# Altium PCB DSP6748_F.PcbDoc (part 8 of 16)
Units mil, origin at the board's own origin, x right, y up, seen from the top; angles counter-clockwise.
Board outline 8188.98 x 4055.12 mil, 4 copper layers (Top Layer, GND, VCC, Bottom Layer); 409 components, 262 nets, 1424 pads, 350 vias.
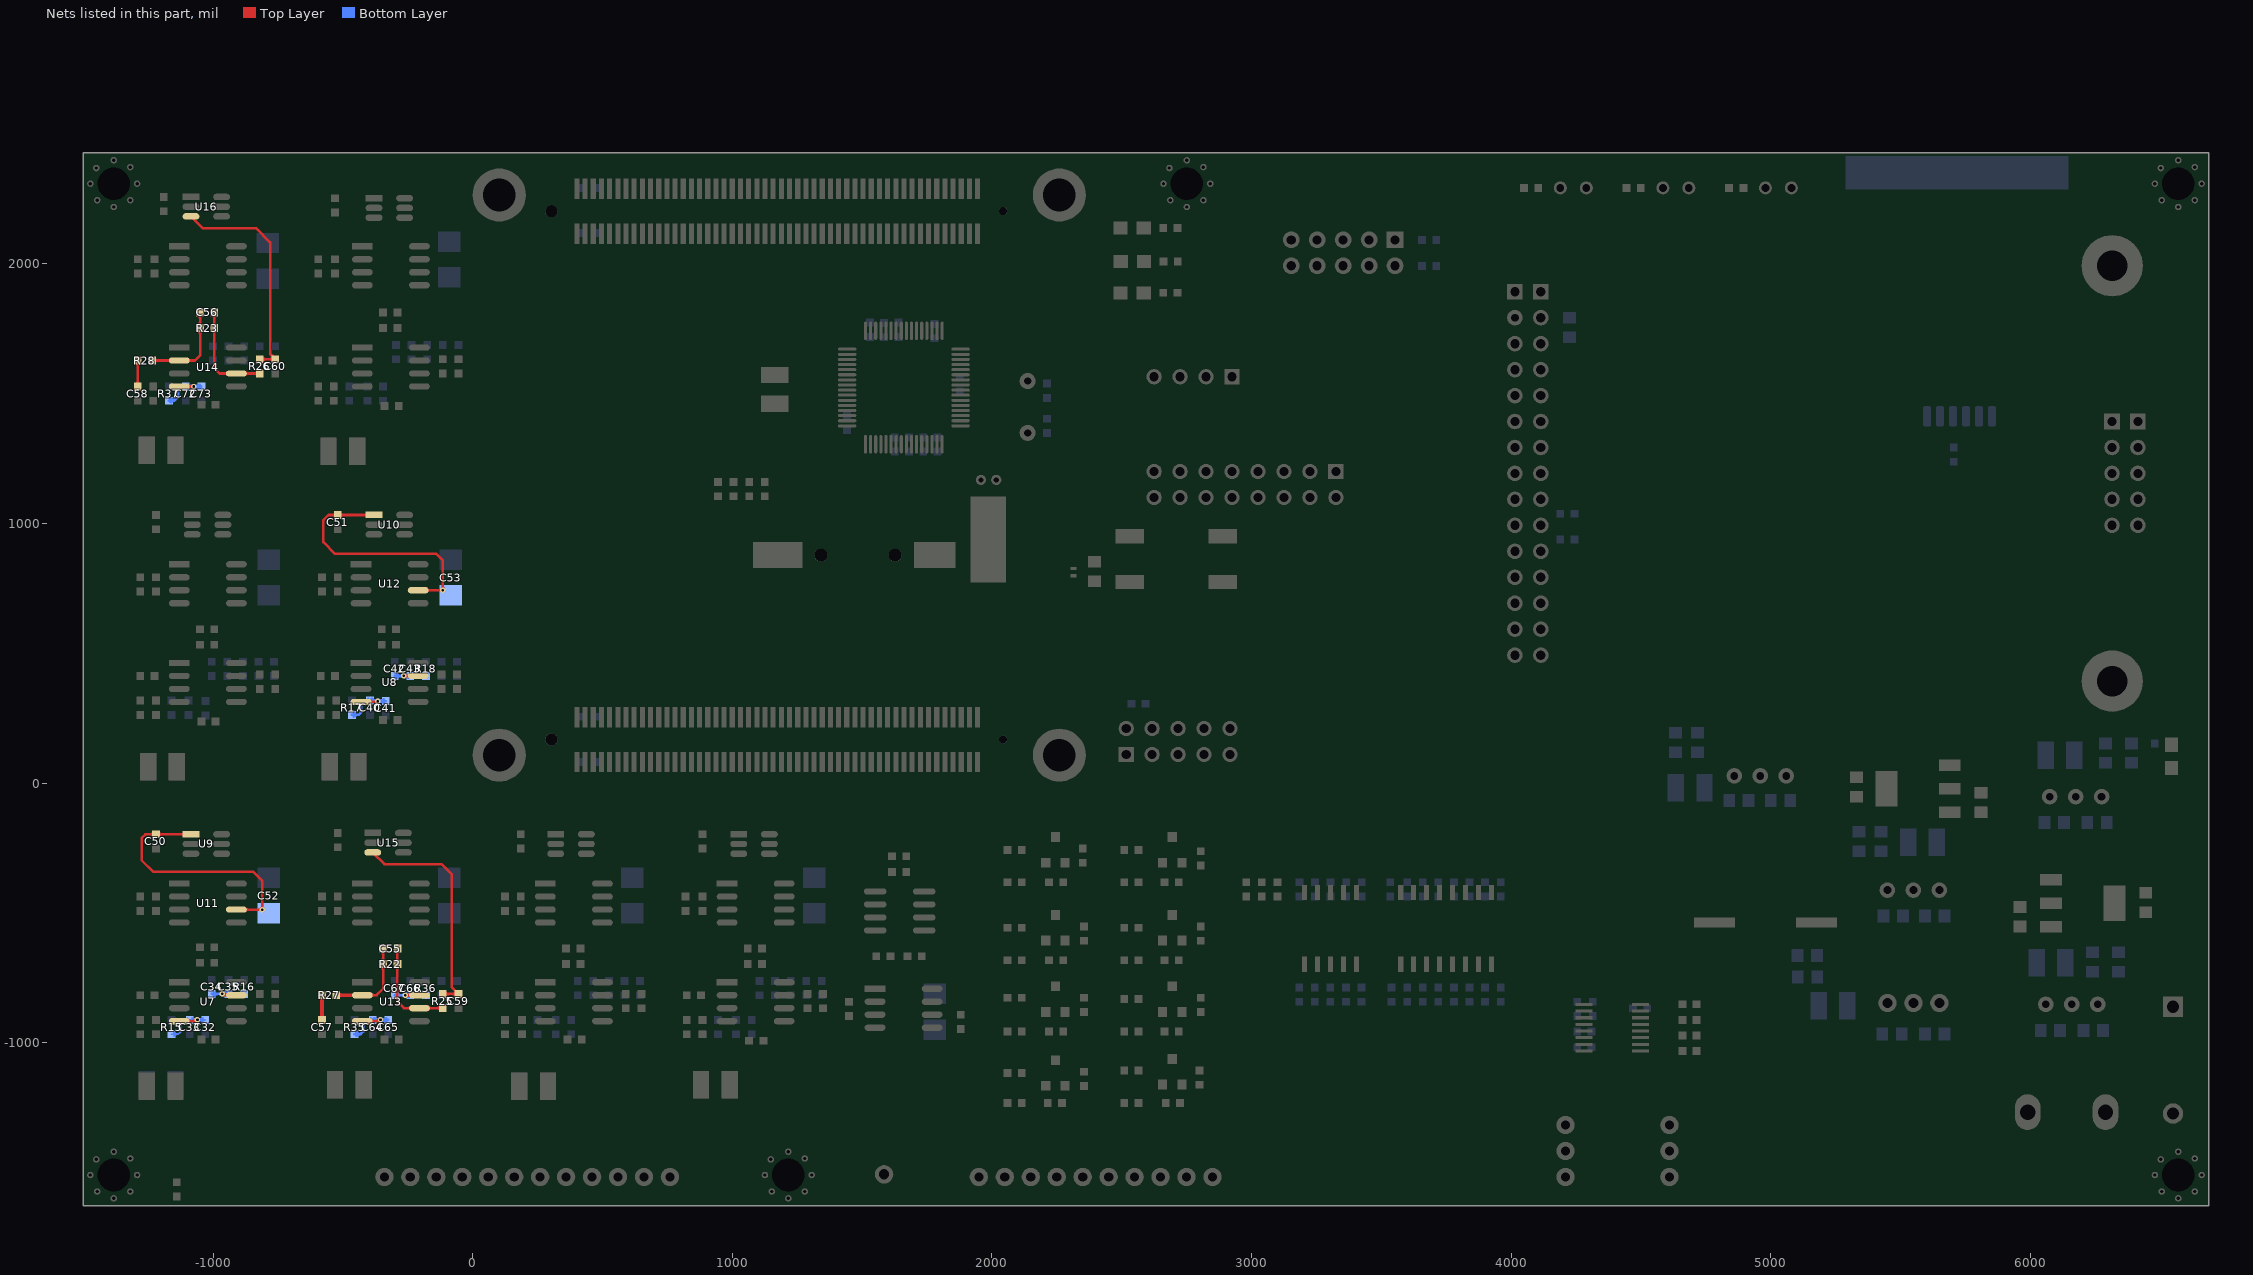
[diagram p10: the nets of this part, all layers, seen from the top]

## Via types
v1: diameter 21, hole 10, Top Layer to Bottom Layer, 244 vias
v2: diameter 20, hole 10, Top Layer to Bottom Layer, 84 vias
v3: diameter 32, hole 16, Top Layer to Bottom Layer, 11 vias
v4: diameter 24, hole 12, Top Layer to Bottom Layer, 7 vias
v5: diameter 39.37, hole 19.68, Top Layer to Bottom Layer, 3 vias
v6: diameter 30, hole 15, Top Layer to Bottom Layer, 1 vias

## Nets (pads, with @x,y where several pads share a name; then routed paths per layer and width w, separated by ;. In a path a pad name is that pad's centre, name@x,y a point inside that pad or via, vN(x,y) a via of type N, cw(c..) or ccw(c..) an arc to the next point about the centre after c; other vN are vias at no path point) (continued)
NetC32_2: C32.2 C33.2 R15.2 U7.4 | length 1418.7
  Top Layer w10: U7.4@-1140.19,-917.48 U7.4@-1130.19,-917.48 -1065.19,-917.48 v1(-1060.19,-912.48) ; U7.4@-1097.24,-922.43 cw(c-1085.29,-934.38) -1085.29,-917.48 ; U7.4@-1097.24,-922.43 cw(c-1085.29,-934.38) -1085.29,-917.48 ; U7.4@-1097.24,-922.43 cw(c-1085.29,-934.38) -1085.29,-917.48 ; U7.4@-1097.24,-912.53 ccw(c-1085.29,-900.58) -1085.29,-917.48 ; U7.4@-1097.24,-912.53 ccw(c-1085.29,-900.58) -1085.29,-917.48 ; U7.4@-1097.24,-912.53 ccw(c-1085.29,-900.58) -1085.29,-917.48 ; -1085.54,-917.48 ccw(c-1085.54,-887.13) v1@-1064.08,-908.59 ; -1085.54,-917.48 ccw(c-1085.54,-887.13) v1@-1064.08,-908.59 ; -1085.54,-917.48 ccw(c-1085.54,-887.13) v1@-1064.08,-908.59
  Bottom Layer w7: R15.2@-1160.19,-967.48 -1135.19,-967.48 ; C32.2@-1030.19,-912.48 v1(-1060.19,-912.48) C33.2@-1090.19,-912.48 -1113.19,-912.48 ; R15.2@-1151.46,-974.96 cw(c-1135.19,-988.9) -1135.19,-967.48 ; R15.2@-1151.46,-974.96 cw(c-1135.19,-988.9) -1135.19,-967.48 ; R15.2@-1151.46,-974.96 cw(c-1135.19,-988.9) -1135.19,-967.48 ; R15.2@-1151.46,-960 ccw(c-1135.19,-946.06) -1135.19,-967.48 ; R15.2@-1151.46,-960 ccw(c-1135.19,-946.06) -1135.19,-967.48 ; R15.2@-1151.46,-960 ccw(c-1135.19,-946.06) -1135.19,-967.48 ; -1135.19,-967.48 -1125.19,-957.48 -1125.19,-924.48 -1113.19,-912.48 ; -1113.19,-912.48 cw(c-1113.19,-929.73) C33.2@-1099.39,-919.38 ; -1113.19,-912.48 ccw(c-1113.19,-895.23) C33.2@-1099.39,-905.58 ; -1113.19,-912.48 cw(c-1113.19,-929.73) C33.2@-1099.39,-919.38 ; -1113.19,-912.48 ccw(c-1113.19,-895.23) C33.2@-1099.39,-905.58 ; -1113.19,-912.48 ccw(c-1113.19,-895.23) C33.2@-1099.39,-905.58 ; -1113.19,-912.48 cw(c-1113.19,-929.73) C33.2@-1099.39,-919.38 ; C33.2@-1082.06,-920.61 cw(c-1062.43,-940.24) v1@-1062.43,-912.48 ; C33.2@-1082.06,-920.61 cw(c-1062.43,-940.24) v1@-1062.43,-912.48 ; C33.2@-1082.06,-920.61 cw(c-1062.43,-940.24) v1@-1062.43,-912.48 ; C33.2@-1082.06,-904.35 ccw(c-1062.43,-884.72) v1@-1062.43,-912.48 ; C33.2@-1082.06,-904.35 ccw(c-1062.43,-884.72) v1@-1062.43,-912.48 ; C33.2@-1082.06,-904.35 ccw(c-1062.43,-884.72) v1@-1062.43,-912.48 ; C33.2@-1077.09,-912.48 cw(c-1077.09,-929.38) v1@-1065.14,-917.43 ; C33.2@-1077.09,-912.48 ccw(c-1077.09,-895.58) v1@-1065.14,-907.53 ; C33.2@-1077.09,-912.48 cw(c-1077.09,-929.38) v1@-1065.14,-917.43 ; C33.2@-1077.09,-912.48 ccw(c-1077.09,-895.58) v1@-1065.14,-907.53 ; C33.2@-1077.09,-912.48 ccw(c-1077.09,-895.58) v1@-1065.14,-907.53 ; C33.2@-1077.09,-912.48 cw(c-1077.09,-929.38) v1@-1065.14,-917.43 ; C33.2@-1075.34,-915.94 cw(c-1072.05,-928.21) v1@-1064.41,-918.07 ; C33.2@-1075.34,-915.94 cw(c-1072.05,-928.21) v1@-1064.41,-918.07 ; C33.2@-1075.34,-915.94 cw(c-1072.05,-928.21) v1@-1064.41,-918.07 ; C33.2@-1075.34,-909.02 ccw(c-1072.05,-896.76) v1@-1064.41,-906.89 ; C33.2@-1075.34,-909.02 ccw(c-1072.05,-896.76) v1@-1064.41,-906.89 ; C33.2@-1075.34,-909.02 ccw(c-1072.05,-896.76) v1@-1064.41,-906.89 ; C33.2@-1075.31,-915.93 ccw(c-1079.18,-901.52) v1@-1066.25,-908.98 ; C33.2@-1075.31,-915.93 ccw(c-1079.18,-901.52) v1@-1066.25,-908.98 ; C33.2@-1075.31,-915.93 ccw(c-1079.18,-901.52) v1@-1066.25,-908.98 ; C33.2@-1075.31,-909.03 cw(c-1079.18,-923.44) v1@-1066.25,-915.98 ; C33.2@-1075.31,-909.03 cw(c-1079.18,-923.44) v1@-1066.25,-915.98 ; C33.2@-1075.31,-909.03 cw(c-1079.18,-923.44) v1@-1066.25,-915.98 ; -1074.31,-913.22 ccw(c-1075.36,-917.13) -1079.22,-915.92 cw(c-1075.36,-917.13) -1074.31,-913.22 ; -1074.31,-913.22 cw(c-1072.39,-906.05) -1079.37,-908.58 ccw(c-1072.39,-906.05) -1074.31,-913.22 ; -1074.31,-911.74 ccw(c-1072.39,-918.91) -1079.37,-916.39 cw(c-1072.39,-918.91) -1074.31,-911.74 ; -1074.31,-911.74 cw(c-1075.36,-907.83) -1079.22,-909.04 ccw(c-1075.36,-907.83) -1074.31,-911.74 ; v1@-1057.95,-912.48 cw(c-1057.95,-940.24) C32.2@-1038.32,-920.61 ; v1@-1057.95,-912.48 ccw(c-1057.95,-884.72) C32.2@-1038.32,-904.35 ; v1@-1057.95,-912.48 cw(c-1057.95,-940.24) C32.2@-1038.32,-920.61 ; v1@-1057.95,-912.48 ccw(c-1057.95,-884.72) C32.2@-1038.32,-904.35 ; v1@-1057.95,-912.48 ccw(c-1057.95,-884.72) C32.2@-1038.32,-904.35 ; v1@-1057.95,-912.48 cw(c-1057.95,-940.24) C32.2@-1038.32,-920.61 ; v1@-1055.97,-918.07 cw(c-1048.33,-928.2) C32.2@-1045.04,-915.94 ; v1@-1055.97,-918.07 cw(c-1048.33,-928.2) C32.2@-1045.04,-915.94 ; v1@-1055.97,-918.07 cw(c-1048.33,-928.2) C32.2@-1045.04,-915.94 ; v1@-1055.97,-906.89 ccw(c-1048.33,-896.76) C32.2@-1045.04,-909.02 ; v1@-1055.97,-906.89 ccw(c-1048.33,-896.76) C32.2@-1045.04,-909.02 ; v1@-1055.97,-906.89 ccw(c-1048.33,-896.76) C32.2@-1045.04,-909.02 ; v1@-1055.24,-917.43 cw(c-1043.29,-929.38) C32.2@-1043.29,-912.48 ; v1@-1055.24,-917.43 cw(c-1043.29,-929.38) C32.2@-1043.29,-912.48 ; v1@-1055.24,-917.43 cw(c-1043.29,-929.38) C32.2@-1043.29,-912.48 ; v1@-1055.24,-907.53 ccw(c-1043.29,-895.58) C32.2@-1043.29,-912.48 ; v1@-1055.24,-907.53 ccw(c-1043.29,-895.58) C32.2@-1043.29,-912.48 ; v1@-1055.24,-907.53 ccw(c-1043.29,-895.58) C32.2@-1043.29,-912.48 ; v1@-1054.13,-915.98 cw(c-1041.2,-923.44) C32.2@-1045.07,-909.03 ; v1@-1054.13,-915.98 cw(c-1041.2,-923.44) C32.2@-1045.07,-909.03 ; v1@-1054.13,-915.98 cw(c-1041.2,-923.44) C32.2@-1045.07,-909.03 ; v1@-1054.13,-908.98 ccw(c-1041.2,-901.52) C32.2@-1045.07,-915.93 ; v1@-1054.13,-908.98 ccw(c-1041.2,-901.52) C32.2@-1045.07,-915.93 ; v1@-1054.13,-908.98 ccw(c-1041.2,-901.52) C32.2@-1045.07,-915.93 ; -1046.07,-913.22 ccw(c-1047.99,-906.05) -1041.01,-908.58 cw(c-1047.99,-906.05) -1046.07,-913.22 ; -1046.07,-913.22 cw(c-1045.02,-917.13) -1041.16,-915.92 ccw(c-1045.02,-917.13) -1046.07,-913.22 ; -1046.07,-911.74 ccw(c-1045.02,-907.83) -1041.16,-909.04 cw(c-1045.02,-907.83) -1046.07,-911.74 ; -1046.07,-911.74 cw(c-1047.99,-918.91) -1041.01,-916.39 ccw(c-1047.99,-918.91) -1046.07,-911.74
NetC34_2: C34.2 C35.2 R16.1 U7.7 | length 1055.9
  Top Layer w10: v1(-964.19,-812.48) -959.19,-817.48 U7.7@-910.19,-817.48 ; v1@-960.3,-808.59 ccw(c-938.84,-787.13) U7.7@-938.84,-817.48 ; v1@-960.3,-808.59 ccw(c-938.84,-787.13) U7.7@-938.84,-817.48 ; v1@-960.3,-808.59 ccw(c-938.84,-787.13) U7.7@-938.84,-817.48 ; v1@-959.43,-809.73 ccw(c-940.61,-798.87) U7.7@-946.24,-819.85 ; v1@-959.43,-809.73 ccw(c-940.61,-798.87) U7.7@-946.24,-819.85 ; v1@-959.43,-809.73 ccw(c-940.61,-798.87) U7.7@-946.24,-819.85 ; v1@-955.09,-817.48 cw(c-955.09,-834.38) U7.7@-943.14,-822.43 ; v1@-955.09,-817.48 ccw(c-955.09,-800.58) U7.7@-943.14,-812.53 ; v1@-955.09,-817.48 cw(c-955.09,-834.38) U7.7@-943.14,-822.43 ; v1@-955.09,-817.48 ccw(c-955.09,-800.58) U7.7@-943.14,-812.53 ; v1@-955.09,-817.48 ccw(c-955.09,-800.58) U7.7@-943.14,-812.53 ; v1@-955.09,-817.48 cw(c-955.09,-834.38) U7.7@-943.14,-822.43 ; v1@-960.29,-816.36 cw(c-953.88,-822.75) -949.35,-814.91 ccw(c-953.88,-822.75) v1@-960.29,-816.36
  Bottom Layer w10: C34.2@-1005.19,-812.48 v1(-964.19,-812.48) ; v1@-960.3,-816.37 cw(c-950.91,-825.76) -950.91,-812.48 cw(c-950.91,-799.2) v1@-960.3,-808.59 ; R16.1@-880.19,-812.48 C35.2@-940.19,-812.48 v1(-964.19,-812.48) ; C34.2@-998.12,-819.55 cw(c-981.05,-836.62) -981.05,-812.48 ; C34.2@-998.12,-819.55 cw(c-981.05,-836.62) -981.05,-812.48 ; C34.2@-998.12,-819.55 cw(c-981.05,-836.62) -981.05,-812.48 ; C34.2@-998.12,-805.41 ccw(c-981.05,-788.34) -981.05,-812.48 ; C34.2@-998.12,-805.41 ccw(c-981.05,-788.34) -981.05,-812.48 ; C34.2@-998.12,-805.41 ccw(c-981.05,-788.34) -981.05,-812.48 ; -977.47,-812.48 cw(c-977.47,-825.76) v1@-968.08,-816.37 ; -977.47,-812.48 ccw(c-977.47,-799.2) v1@-968.08,-808.59 ; -977.47,-812.48 cw(c-977.47,-825.76) v1@-968.08,-816.37 ; -977.47,-812.48 ccw(c-977.47,-799.2) v1@-968.08,-808.59 ; -977.47,-812.48 ccw(c-977.47,-799.2) v1@-968.08,-808.59 ; -977.47,-812.48 cw(c-977.47,-825.76) v1@-968.08,-816.37 ; v1(-964.19,-812.48) cw(c-964.19,-836.28) C35.2@-947.29,-819.52 ; v1(-964.19,-812.48) ccw(c-964.19,-788.68) C35.2@-947.29,-805.44 ; v1(-964.19,-812.48) cw(c-964.19,-836.28) C35.2@-947.29,-819.52 ; v1(-964.19,-812.48) ccw(c-964.19,-788.68) C35.2@-947.29,-805.44 ; v1(-964.19,-812.48) ccw(c-964.19,-788.68) C35.2@-947.29,-805.44 ; v1(-964.19,-812.48) cw(c-964.19,-836.28) C35.2@-947.29,-819.52 ; v1@-961.19,-817.09 cw(c-955.15,-826.34) C35.2@-952.29,-815.67 ; v1@-961.19,-817.09 cw(c-955.15,-826.34) C35.2@-952.29,-815.67 ; v1@-961.19,-817.09 cw(c-955.15,-826.34) C35.2@-952.29,-815.67 ; v1@-961.19,-807.87 ccw(c-955.15,-798.62) C35.2@-952.29,-809.29 ; v1@-961.19,-807.87 ccw(c-955.15,-798.62) C35.2@-952.29,-809.29 ; v1@-961.19,-807.87 ccw(c-955.15,-798.62) C35.2@-952.29,-809.29 ; v1@-959.28,-814.97 cw(c-949.43,-819.96) C35.2@-952.29,-809.29 ; v1@-959.28,-814.97 cw(c-949.43,-819.96) C35.2@-952.29,-809.29 ; v1@-959.28,-814.97 cw(c-949.43,-819.96) C35.2@-952.29,-809.29 ; v1@-959.28,-809.99 ccw(c-949.43,-805) C35.2@-952.29,-815.67 ; v1@-959.28,-809.99 ccw(c-949.43,-805) C35.2@-952.29,-815.67 ; v1@-959.28,-809.99 ccw(c-949.43,-805) C35.2@-952.29,-815.67 ; C35.2@-933.12,-819.55 cw(c-916.05,-836.62) -916.05,-812.48 ; C35.2@-933.12,-819.55 cw(c-916.05,-836.62) -916.05,-812.48 ; C35.2@-933.12,-819.55 cw(c-916.05,-836.62) -916.05,-812.48 ; C35.2@-933.12,-805.41 ccw(c-916.05,-788.34) -916.05,-812.48 ; C35.2@-933.12,-805.41 ccw(c-916.05,-788.34) -916.05,-812.48 ; C35.2@-933.12,-805.41 ccw(c-916.05,-788.34) -916.05,-812.48 ; -904.33,-812.48 cw(c-904.33,-836.62) R16.1@-887.26,-819.55 ; -904.33,-812.48 ccw(c-904.33,-788.34) R16.1@-887.26,-805.41 ; -904.33,-812.48 cw(c-904.33,-836.62) R16.1@-887.26,-819.55 ; -904.33,-812.48 ccw(c-904.33,-788.34) R16.1@-887.26,-805.41 ; -904.33,-812.48 ccw(c-904.33,-788.34) R16.1@-887.26,-805.41 ; -904.33,-812.48 cw(c-904.33,-836.62) R16.1@-887.26,-819.55
NetC40_2: C40.2 C41.2 R17.2 U8.4 | length 1078.9
  Top Layer w10: U8.4@-430.19,312.52 -368.19,312.52 v1(-365.19,315.52) ; U8.4@-397.24,307.57 cw(c-385.29,295.62) -385.29,312.52 ; U8.4@-397.24,307.57 cw(c-385.29,295.62) -385.29,312.52 ; U8.4@-397.24,307.57 cw(c-385.29,295.62) -385.29,312.52 ; U8.4@-397.24,317.47 ccw(c-385.29,329.42) -385.29,312.52 ; U8.4@-397.24,317.47 ccw(c-385.29,329.42) -385.29,312.52 ; U8.4@-397.24,317.47 ccw(c-385.29,329.42) -385.29,312.52 ; -385.71,312.52 ccw(c-385.71,336.04) v1@-369.08,319.41 ; -385.71,312.52 ccw(c-385.71,336.04) v1@-369.08,319.41 ; -385.71,312.52 ccw(c-385.71,336.04) v1@-369.08,319.41
  Bottom Layer w10: R17.2@-465.19,262.52 -440.19,262.52 -430.19,272.52 -430.19,305.52 -420.19,315.52 ; C41.2@-335.19,315.52 v1(-365.19,315.52) -420.19,315.52 ; R17.2@-458.12,255.45 cw(c-441.05,238.38) -441.05,262.52 ; R17.2@-458.12,255.45 cw(c-441.05,238.38) -441.05,262.52 ; R17.2@-458.12,255.45 cw(c-441.05,238.38) -441.05,262.52 ; R17.2@-458.12,269.59 ccw(c-441.05,286.66) -441.05,262.52 ; R17.2@-458.12,269.59 ccw(c-441.05,286.66) -441.05,262.52 ; R17.2@-458.12,269.59 ccw(c-441.05,286.66) -441.05,262.52 ; -420.19,315.52 ccw(c-420.19,337.56) C40.2@-402.99,323.77 ; -420.19,315.52 ccw(c-420.19,337.56) C40.2@-402.99,323.77 ; -420.19,315.52 ccw(c-420.19,337.56) C40.2@-402.99,323.77 ; -414.5,315.52 cw(c-414.5,298.21) C40.2@-402.26,310.45 ; -414.5,315.52 cw(c-414.5,298.21) C40.2@-402.26,310.45 ; -414.5,315.52 cw(c-414.5,298.21) C40.2@-402.26,310.45 ; C40.2@-388.12,310.45 cw(c-375.88,298.21) -375.88,315.52 ; C40.2@-388.12,310.45 cw(c-375.88,298.21) -375.88,315.52 ; C40.2@-388.12,310.45 cw(c-375.88,298.21) -375.88,315.52 ; C40.2@-388.12,324.59 ccw(c-366.22,346.49) v1@-366.22,315.52 ; C40.2@-388.12,324.59 ccw(c-366.22,346.49) v1@-366.22,315.52 ; C40.2@-388.12,324.59 ccw(c-366.22,346.49) v1@-366.22,315.52 ; -378.71,318.87 ccw(c-375.03,332.57) v1@-367.94,320.28 ; -378.71,318.87 ccw(c-375.03,332.57) v1@-367.94,320.28 ; -378.71,318.87 ccw(c-375.03,332.57) v1@-367.94,320.28 ; -378.47,315.52 cw(c-378.47,302.24) v1@-369.08,311.63 ; -378.47,315.52 ccw(c-378.47,328.8) v1@-369.08,319.41 ; -378.47,315.52 cw(c-378.47,302.24) v1@-369.08,311.63 ; -378.47,315.52 ccw(c-378.47,328.8) v1@-369.08,319.41 ; -378.47,315.52 ccw(c-378.47,328.8) v1@-369.08,319.41 ; -378.47,315.52 cw(c-378.47,302.24) v1@-369.08,311.63 ; -377.46,318.53 cw(c-380.66,306.59) v1@-369.95,312.77 ; -377.46,318.53 cw(c-380.66,306.59) v1@-369.95,312.77 ; -377.46,318.53 cw(c-380.66,306.59) v1@-369.95,312.77 ; v1@-362.14,310.94 cw(c-353.73,298.29) C41.2@-349.8,312.97 ; v1@-362.14,310.94 cw(c-353.73,298.29) C41.2@-349.8,312.97 ; v1@-362.14,310.94 cw(c-353.73,298.29) C41.2@-349.8,312.97 ; v1@-362.14,320.1 ccw(c-353.73,332.75) C41.2@-349.8,318.07 ; v1@-362.14,320.1 ccw(c-353.73,332.75) C41.2@-349.8,318.07 ; v1@-362.14,320.1 ccw(c-353.73,332.75) C41.2@-349.8,318.07 ; v1@-361.3,311.63 cw(c-351.91,302.24) -351.91,315.52 ; v1@-361.3,311.63 cw(c-351.91,302.24) -351.91,315.52 ; v1@-361.3,311.63 cw(c-351.91,302.24) -351.91,315.52 ; v1@-361.3,319.41 ccw(c-351.91,328.8) -351.91,315.52 ; v1@-361.3,319.41 ccw(c-351.91,328.8) -351.91,315.52 ; v1@-361.3,319.41 ccw(c-351.91,328.8) -351.91,315.52 ; v1@-359.33,315.52 cw(c-359.33,291.38) C41.2@-342.26,308.45 ; v1@-359.33,315.52 ccw(c-359.33,339.66) C41.2@-342.26,322.59 ; v1@-359.33,315.52 cw(c-359.33,291.38) C41.2@-342.26,308.45 ; v1@-359.33,315.52 ccw(c-359.33,339.66) C41.2@-342.26,322.59 ; v1@-359.33,315.52 ccw(c-359.33,339.66) C41.2@-342.26,322.59 ; v1@-359.33,315.52 cw(c-359.33,291.38) C41.2@-342.26,308.45
NetC42_2: C42.2 C43.2 R18.1 U8.7 | length 973.6
  Top Layer w10: v1@-264.19,412.52 U8.7@-210.19,412.52 ; v1@-261.3,408.63 cw(c-251.91,399.24) -251.91,412.52 ; v1@-261.3,408.63 cw(c-251.91,399.24) -251.91,412.52 ; v1@-261.3,408.63 cw(c-251.91,399.24) -251.91,412.52 ; v1@-261.3,416.41 ccw(c-251.91,425.8) -251.91,412.52 ; v1@-261.3,416.41 ccw(c-251.91,425.8) -251.91,412.52 ; v1@-261.3,416.41 ccw(c-251.91,425.8) -251.91,412.52 ; v1@-255.09,412.52 cw(c-255.09,395.62) U8.7@-243.14,407.57 ; v1@-255.09,412.52 ccw(c-255.09,429.42) U8.7@-243.14,417.47 ; v1@-255.09,412.52 cw(c-255.09,395.62) U8.7@-243.14,407.57 ; v1@-255.09,412.52 ccw(c-255.09,429.42) U8.7@-243.14,417.47 ; v1@-255.09,412.52 ccw(c-255.09,429.42) U8.7@-243.14,417.47 ; v1@-255.09,412.52 cw(c-255.09,395.62) U8.7@-243.14,407.57
  Bottom Layer w10: C42.2@-300.19,412.52 C43.2@-240.19,412.52 R18.1@-180.19,412.52 ; v1@-261.3,408.63 cw(c-251.91,399.24) -251.91,412.52 cw(c-251.91,425.8) v1@-261.3,416.41 ; C42.2@-293.12,405.45 cw(c-276.05,388.38) -276.05,412.52 ; C42.2@-293.12,405.45 cw(c-276.05,388.38) -276.05,412.52 ; C42.2@-293.12,405.45 cw(c-276.05,388.38) -276.05,412.52 ; C42.2@-293.12,419.59 ccw(c-276.05,436.66) -276.05,412.52 ; C42.2@-293.12,419.59 ccw(c-276.05,436.66) -276.05,412.52 ; C42.2@-293.12,419.59 ccw(c-276.05,436.66) -276.05,412.52 ; -278.47,412.52 cw(c-278.47,399.24) v1@-269.08,408.63 ; -278.47,412.52 ccw(c-278.47,425.8) v1@-269.08,416.41 ; -278.47,412.52 cw(c-278.47,399.24) v1@-269.08,408.63 ; -278.47,412.52 ccw(c-278.47,425.8) v1@-269.08,416.41 ; -278.47,412.52 ccw(c-278.47,425.8) v1@-269.08,416.41 ; -278.47,412.52 cw(c-278.47,399.24) v1@-269.08,408.63 ; v1@-264.33,412.52 cw(c-264.33,388.38) C43.2@-247.26,405.45 ; v1@-264.33,412.52 ccw(c-264.33,436.66) C43.2@-247.26,419.59 ; v1@-264.33,412.52 cw(c-264.33,388.38) C43.2@-247.26,405.45 ; v1@-264.33,412.52 ccw(c-264.33,436.66) C43.2@-247.26,419.59 ; v1@-264.33,412.52 ccw(c-264.33,436.66) C43.2@-247.26,419.59 ; v1@-264.33,412.52 cw(c-264.33,388.38) C43.2@-247.26,405.45 ; v1@-262.22,407.89 cw(c-255.74,397.8) C43.2@-252.63,409.38 ; v1@-262.22,407.89 cw(c-255.74,397.8) C43.2@-252.63,409.38 ; v1@-262.22,407.89 cw(c-255.74,397.8) C43.2@-252.63,409.38 ; v1@-262.22,417.15 ccw(c-255.74,427.24) C43.2@-252.63,415.65 ; v1@-262.22,417.15 ccw(c-255.74,427.24) C43.2@-252.63,415.65 ; v1@-262.22,417.15 ccw(c-255.74,427.24) C43.2@-252.63,415.65 ; v1@-260.43,409.77 cw(c-249.58,403.51) C43.2@-252.82,415.6 ; v1@-260.43,409.77 cw(c-249.58,403.51) C43.2@-252.82,415.6 ; v1@-260.43,409.77 cw(c-249.58,403.51) C43.2@-252.82,415.6 ; v1@-260.43,415.27 ccw(c-249.58,421.53) C43.2@-252.82,409.44 ; v1@-260.43,415.27 ccw(c-249.58,421.53) C43.2@-252.82,409.44 ; v1@-260.43,415.27 ccw(c-249.58,421.53) C43.2@-252.82,409.44 ; C43.2@-233.12,405.45 cw(c-216.05,388.38) -216.05,412.52 ; C43.2@-233.12,405.45 cw(c-216.05,388.38) -216.05,412.52 ; C43.2@-233.12,405.45 cw(c-216.05,388.38) -216.05,412.52 ; C43.2@-233.12,419.59 ccw(c-216.05,436.66) -216.05,412.52 ; C43.2@-233.12,419.59 ccw(c-216.05,436.66) -216.05,412.52 ; C43.2@-233.12,419.59 ccw(c-216.05,436.66) -216.05,412.52 ; -204.33,412.52 cw(c-204.33,388.38) R18.1@-187.26,405.45 ; -204.33,412.52 ccw(c-204.33,436.66) R18.1@-187.26,419.59 ; -204.33,412.52 cw(c-204.33,388.38) R18.1@-187.26,405.45 ; -204.33,412.52 ccw(c-204.33,436.66) R18.1@-187.26,419.59 ; -204.33,412.52 ccw(c-204.33,436.66) R18.1@-187.26,419.59 ; -204.33,412.52 cw(c-204.33,388.38) R18.1@-187.26,405.45
  other v1: -265.19,412.52
NetC50_2: C50.2 C52.1 U9.1 U11.6 | length 1507
  Top Layer w10: U9.1@-1085.19,-197.48 C50.2@-1220.19,-197.48 -1260.19,-197.48 -1275.19,-212.48 -1275.19,-297.48 -1230.19,-342.48 -845.19,-342.48 -810.19,-377.48 v1(-810.19,-487.48) U11.6@-910.19,-487.48 ; -1244.33,-197.48 cw(c-1244.33,-221.62) C50.2@-1227.26,-204.55 ; -1244.33,-197.48 ccw(c-1244.33,-173.34) C50.2@-1227.26,-190.41 ; -1244.33,-197.48 cw(c-1244.33,-221.62) C50.2@-1227.26,-204.55 ; -1244.33,-197.48 ccw(c-1244.33,-173.34) C50.2@-1227.26,-190.41 ; -1244.33,-197.48 ccw(c-1244.33,-173.34) C50.2@-1227.26,-190.41 ; -1244.33,-197.48 cw(c-1244.33,-221.62) C50.2@-1227.26,-204.55 ; C50.2@-1213.12,-204.55 cw(c-1196.05,-221.62) -1196.05,-197.48 ; C50.2@-1213.12,-204.55 cw(c-1196.05,-221.62) -1196.05,-197.48 ; C50.2@-1213.12,-204.55 cw(c-1196.05,-221.62) -1196.05,-197.48 ; C50.2@-1213.12,-190.41 ccw(c-1196.05,-173.34) -1196.05,-197.48 ; C50.2@-1213.12,-190.41 ccw(c-1196.05,-173.34) -1196.05,-197.48 ; C50.2@-1213.12,-190.41 ccw(c-1196.05,-173.34) -1196.05,-197.48 ; -1123.3,-197.48 cw(c-1123.3,-215.59) U9.1@-1110.49,-202.78 ; -1123.3,-197.48 ccw(c-1123.3,-179.37) U9.1@-1110.49,-192.18 ; -1123.3,-197.48 cw(c-1123.3,-215.59) U9.1@-1110.49,-202.78 ; -1123.3,-197.48 ccw(c-1123.3,-179.37) U9.1@-1110.49,-192.18 ; -1123.3,-197.48 ccw(c-1123.3,-179.37) U9.1@-1110.49,-192.18 ; -1123.3,-197.48 cw(c-1123.3,-215.59) U9.1@-1110.49,-202.78 ; U11.6@-877.24,-492.43 cw(c-865.29,-504.38) -865.29,-487.48 ; U11.6@-877.24,-492.43 cw(c-865.29,-504.38) -865.29,-487.48 ; U11.6@-877.24,-492.43 cw(c-865.29,-504.38) -865.29,-487.48 ; U11.6@-877.24,-482.53 ccw(c-865.29,-470.58) -865.29,-487.48 ; U11.6@-877.24,-482.53 ccw(c-865.29,-470.58) -865.29,-487.48 ; U11.6@-877.24,-482.53 ccw(c-865.29,-470.58) -865.29,-487.48 ; -823.47,-487.48 cw(c-823.47,-500.76) v1@-814.08,-491.37 ; -823.47,-487.48 ccw(c-823.47,-474.2) v1@-814.08,-483.59 ; -823.47,-487.48 cw(c-823.47,-500.76) v1@-814.08,-491.37 ; -823.47,-487.48 ccw(c-823.47,-474.2) v1@-814.08,-483.59 ; -823.47,-487.48 ccw(c-823.47,-474.2) v1@-814.08,-483.59 ; -823.47,-487.48 cw(c-823.47,-500.76) v1@-814.08,-491.37 ; v1@-814.08,-483.59 ccw(c-823.47,-474.2) -810.19,-474.2 ; v1@-814.08,-483.59 ccw(c-823.47,-474.2) -810.19,-474.2 ; v1@-814.08,-483.59 ccw(c-823.47,-474.2) -810.19,-474.2 ; -810.19,-474.2 ccw(c-796.91,-474.2) v1@-806.3,-483.59 ; -810.19,-474.2 ccw(c-796.91,-474.2) v1@-806.3,-483.59 ; -810.19,-474.2 ccw(c-796.91,-474.2) v1@-806.3,-483.59
NetC51_2: C51.2 C53.1 U10.1 U12.6 | length 1504.9
  Top Layer w10: U10.1@-380.19,1032.52 C51.2@-520.19,1032.52 -555.19,1032.52 -575.19,1012.52 -575.19,927.52 -530.19,882.52 -140.19,882.52 -115.19,857.52 v1(-115.19,742.52) U12.6@-210.19,742.52 ; -544.33,1032.52 cw(c-544.33,1008.38) C51.2@-527.26,1025.45 ; -544.33,1032.52 ccw(c-544.33,1056.66) C51.2@-527.26,1039.59 ; -544.33,1032.52 cw(c-544.33,1008.38) C51.2@-527.26,1025.45 ; -544.33,1032.52 ccw(c-544.33,1056.66) C51.2@-527.26,1039.59 ; -544.33,1032.52 ccw(c-544.33,1056.66) C51.2@-527.26,1039.59 ; -544.33,1032.52 cw(c-544.33,1008.38) C51.2@-527.26,1025.45 ; C51.2@-513.12,1025.45 cw(c-496.05,1008.38) -496.05,1032.52 ; C51.2@-513.12,1025.45 cw(c-496.05,1008.38) -496.05,1032.52 ; C51.2@-513.12,1025.45 cw(c-496.05,1008.38) -496.05,1032.52 ; C51.2@-513.12,1039.59 ccw(c-496.05,1056.66) -496.05,1032.52 ; C51.2@-513.12,1039.59 ccw(c-496.05,1056.66) -496.05,1032.52 ; C51.2@-513.12,1039.59 ccw(c-496.05,1056.66) -496.05,1032.52 ; -418.3,1032.52 cw(c-418.3,1014.41) U10.1@-405.49,1027.22 ; -418.3,1032.52 ccw(c-418.3,1050.63) U10.1@-405.49,1037.82 ; -418.3,1032.52 cw(c-418.3,1014.41) U10.1@-405.49,1027.22 ; -418.3,1032.52 ccw(c-418.3,1050.63) U10.1@-405.49,1037.82 ; -418.3,1032.52 ccw(c-418.3,1050.63) U10.1@-405.49,1037.82 ; -418.3,1032.52 cw(c-418.3,1014.41) U10.1@-405.49,1027.22 ; U12.6@-177.24,737.57 cw(c-165.29,725.62) -165.29,742.52 ; U12.6@-177.24,737.57 cw(c-165.29,725.62) -165.29,742.52 ; U12.6@-177.24,737.57 cw(c-165.29,725.62) -165.29,742.52 ; U12.6@-177.24,747.47 ccw(c-165.29,759.42) -165.29,742.52 ; U12.6@-177.24,747.47 ccw(c-165.29,759.42) -165.29,742.52 ; U12.6@-177.24,747.47 ccw(c-165.29,759.42) -165.29,742.52 ; -128.47,742.52 cw(c-128.47,729.24) v1@-119.08,738.63 ; -128.47,742.52 ccw(c-128.47,755.8) v1@-119.08,746.41 ; -128.47,742.52 cw(c-128.47,729.24) v1@-119.08,738.63 ; -128.47,742.52 ccw(c-128.47,755.8) v1@-119.08,746.41 ; -128.47,742.52 ccw(c-128.47,755.8) v1@-119.08,746.41 ; -128.47,742.52 cw(c-128.47,729.24) v1@-119.08,738.63 ; v1@-119.08,746.41 ccw(c-128.47,755.8) -115.19,755.8 ; v1@-119.08,746.41 ccw(c-128.47,755.8) -115.19,755.8 ; v1@-119.08,746.41 ccw(c-128.47,755.8) -115.19,755.8 ; -115.19,755.8 ccw(c-101.91,755.8) v1@-111.3,746.41 ; -115.19,755.8 ccw(c-101.91,755.8) v1@-111.3,746.41 ; -115.19,755.8 ccw(c-101.91,755.8) v1@-111.3,746.41
NetC55_1: C55.1 R22.2 R25.1 U13.6 | length 1004.7
  Top Layer w10: C55.1@-290.19,-637.48 R22.2@-290.19,-697.48 -290.19,-842.48 -265.19,-867.48 U13.6@-205.19,-867.48 R25.1@-115.19,-867.48 ; R22.2@-297.26,-704.55 cw(c-314.33,-721.62) -290.19,-721.62 ; R22.2@-297.26,-704.55 cw(c-314.33,-721.62) -290.19,-721.62 ; R22.2@-297.26,-704.55 cw(c-314.33,-721.62) -290.19,-721.62 ; R22.2@-297.26,-690.41 ccw(c-314.33,-673.34) -290.19,-673.34 ; R22.2@-297.26,-690.41 ccw(c-314.33,-673.34) -290.19,-673.34 ; R22.2@-297.26,-690.41 ccw(c-314.33,-673.34) -290.19,-673.34 ; C55.1@-297.26,-644.55 cw(c-314.33,-661.62) -290.19,-661.62 ; C55.1@-297.26,-644.55 cw(c-314.33,-661.62) -290.19,-661.62 ; C55.1@-297.26,-644.55 cw(c-314.33,-661.62) -290.19,-661.62 ; -290.19,-721.62 cw(c-266.05,-721.62) R22.2@-283.12,-704.55 ; -290.19,-721.62 cw(c-266.05,-721.62) R22.2@-283.12,-704.55 ; -290.19,-721.62 cw(c-266.05,-721.62) R22.2@-283.12,-704.55 ; -290.19,-673.34 ccw(c-266.05,-673.34) R22.2@-283.12,-690.41 ; -290.19,-673.34 ccw(c-266.05,-673.34) R22.2@-283.12,-690.41 ; -290.19,-673.34 ccw(c-266.05,-673.34) R22.2@-283.12,-690.41 ; -290.19,-661.62 cw(c-266.05,-661.62) C55.1@-283.12,-644.55 ; -290.19,-661.62 cw(c-266.05,-661.62) C55.1@-283.12,-644.55 ; -290.19,-661.62 cw(c-266.05,-661.62) C55.1@-283.12,-644.55 ; -250.09,-867.48 cw(c-250.09,-884.38) U13.6@-238.14,-872.43 ; -250.09,-867.48 ccw(c-250.09,-850.58) U13.6@-238.14,-862.53 ; -250.09,-867.48 cw(c-250.09,-884.38) U13.6@-238.14,-872.43 ; -250.09,-867.48 ccw(c-250.09,-850.58) U13.6@-238.14,-862.53 ; -250.09,-867.48 ccw(c-250.09,-850.58) U13.6@-238.14,-862.53 ; -250.09,-867.48 cw(c-250.09,-884.38) U13.6@-238.14,-872.43 ; U13.6@-172.24,-872.43 cw(c-160.29,-884.38) -160.29,-867.48 ; U13.6@-172.24,-872.43 cw(c-160.29,-884.38) -160.29,-867.48 ; U13.6@-172.24,-872.43 cw(c-160.29,-884.38) -160.29,-867.48 ; U13.6@-172.24,-862.53 ccw(c-160.29,-850.58) -160.29,-867.48 ; U13.6@-172.24,-862.53 ccw(c-160.29,-850.58) -160.29,-867.48 ; U13.6@-172.24,-862.53 ccw(c-160.29,-850.58) -160.29,-867.48 ; -139.33,-867.48 cw(c-139.33,-891.62) R25.1@-122.26,-874.55 ; -139.33,-867.48 ccw(c-139.33,-843.34) R25.1@-122.26,-860.41 ; -139.33,-867.48 cw(c-139.33,-891.62) R25.1@-122.26,-874.55 ; -139.33,-867.48 ccw(c-139.33,-843.34) R25.1@-122.26,-860.41 ; -139.33,-867.48 ccw(c-139.33,-843.34) R25.1@-122.26,-860.41 ; -139.33,-867.48 cw(c-139.33,-891.62) R25.1@-122.26,-874.55
NetC55_2: C55.2 R22.1 R27.2 U13.2 | length 851.6
  Top Layer w10: U13.2@-425.19,-817.48 -370.19,-817.48 -345.19,-792.48 R22.1@-345.19,-697.48 C55.2@-345.19,-637.48 ; U13.2@-392.24,-822.43 cw(c-380.29,-834.38) -380.29,-817.48 ; U13.2@-392.24,-822.43 cw(c-380.29,-834.38) -380.29,-817.48 ; U13.2@-392.24,-822.43 cw(c-380.29,-834.38) -380.29,-817.48 ; U13.2@-392.24,-812.53 ccw(c-380.29,-800.58) -380.29,-817.48 ; U13.2@-392.24,-812.53 ccw(c-380.29,-800.58) -380.29,-817.48 ; U13.2@-392.24,-812.53 ccw(c-380.29,-800.58) -380.29,-817.48 ; R22.1@-352.26,-704.55 cw(c-369.33,-721.62) -345.19,-721.62 ; R22.1@-352.26,-704.55 cw(c-369.33,-721.62) -345.19,-721.62 ; R22.1@-352.26,-704.55 cw(c-369.33,-721.62) -345.19,-721.62 ; R22.1@-352.26,-690.41 ccw(c-369.33,-673.34) -345.19,-673.34 ; R22.1@-352.26,-690.41 ccw(c-369.33,-673.34) -345.19,-673.34 ; R22.1@-352.26,-690.41 ccw(c-369.33,-673.34) -345.19,-673.34 ; C55.2@-352.26,-644.55 cw(c-369.33,-661.62) -345.19,-661.62 ; C55.2@-352.26,-644.55 cw(c-369.33,-661.62) -345.19,-661.62 ; C55.2@-352.26,-644.55 cw(c-369.33,-661.62) -345.19,-661.62 ; -345.19,-721.62 cw(c-321.05,-721.62) R22.1@-338.12,-704.55 ; -345.19,-721.62 cw(c-321.05,-721.62) R22.1@-338.12,-704.55 ; -345.19,-721.62 cw(c-321.05,-721.62) R22.1@-338.12,-704.55 ; -345.19,-673.34 ccw(c-321.05,-673.34) R22.1@-338.12,-690.41 ; -345.19,-673.34 ccw(c-321.05,-673.34) R22.1@-338.12,-690.41 ; -345.19,-673.34 ccw(c-321.05,-673.34) R22.1@-338.12,-690.41 ; -345.19,-661.62 cw(c-321.05,-661.62) C55.2@-338.12,-644.55 ; -345.19,-661.62 cw(c-321.05,-661.62) C55.2@-338.12,-644.55 ; -345.19,-661.62 cw(c-321.05,-661.62) C55.2@-338.12,-644.55
  Top Layer w15: R27.2@-525.19,-817.48 U13.2@-425.19,-817.48 ; R27.2@-519.89,-822.78 cw(c-507.08,-835.59) -507.08,-817.48 ; R27.2@-519.89,-822.78 cw(c-507.08,-835.59) -507.08,-817.48 ; R27.2@-519.89,-822.78 cw(c-507.08,-835.59) -507.08,-817.48 ; R27.2@-519.89,-812.18 ccw(c-507.08,-799.37) -507.08,-817.48 ; R27.2@-519.89,-812.18 ccw(c-507.08,-799.37) -507.08,-817.48 ; R27.2@-519.89,-812.18 ccw(c-507.08,-799.37) -507.08,-817.48
NetC56_1: C56.1 R23.2 R26.1 U14.6 | length 1012.6
  Top Layer w10: C56.1@-995.19,1812.52 R23.2@-995.19,1752.52 -995.19,1597.52 -975.19,1577.52 U14.6@-910.19,1577.52 R26.1@-820.19,1577.52 ; R23.2@-1002.26,1745.45 cw(c-1019.33,1728.38) -995.19,1728.38 ; R23.2@-1002.26,1745.45 cw(c-1019.33,1728.38) -995.19,1728.38 ; R23.2@-1002.26,1745.45 cw(c-1019.33,1728.38) -995.19,1728.38 ; R23.2@-1002.26,1759.59 ccw(c-1019.33,1776.66) -995.19,1776.66 ; R23.2@-1002.26,1759.59 ccw(c-1019.33,1776.66) -995.19,1776.66 ; R23.2@-1002.26,1759.59 ccw(c-1019.33,1776.66) -995.19,1776.66 ; C56.1@-1002.26,1805.45 cw(c-1019.33,1788.38) -995.19,1788.38 ; C56.1@-1002.26,1805.45 cw(c-1019.33,1788.38) -995.19,1788.38 ; C56.1@-1002.26,1805.45 cw(c-1019.33,1788.38) -995.19,1788.38 ; -995.19,1728.38 cw(c-971.05,1728.38) R23.2@-988.12,1745.45 ; -995.19,1728.38 cw(c-971.05,1728.38) R23.2@-988.12,1745.45 ; -995.19,1728.38 cw(c-971.05,1728.38) R23.2@-988.12,1745.45 ; -995.19,1776.66 ccw(c-971.05,1776.66) R23.2@-988.12,1759.59 ; -995.19,1776.66 ccw(c-971.05,1776.66) R23.2@-988.12,1759.59 ; -995.19,1776.66 ccw(c-971.05,1776.66) R23.2@-988.12,1759.59 ; -995.19,1788.38 cw(c-971.05,1788.38) C56.1@-988.12,1805.45 ; -995.19,1788.38 cw(c-971.05,1788.38) C56.1@-988.12,1805.45 ; -995.19,1788.38 cw(c-971.05,1788.38) C56.1@-988.12,1805.45 ; -955.09,1577.52 cw(c-955.09,1560.62) U14.6@-943.14,1572.57 ; -955.09,1577.52 ccw(c-955.09,1594.42) U14.6@-943.14,1582.47 ; -955.09,1577.52 cw(c-955.09,1560.62) U14.6@-943.14,1572.57 ; -955.09,1577.52 ccw(c-955.09,1594.42) U14.6@-943.14,1582.47 ; -955.09,1577.52 ccw(c-955.09,1594.42) U14.6@-943.14,1582.47 ; -955.09,1577.52 cw(c-955.09,1560.62) U14.6@-943.14,1572.57 ; U14.6@-877.24,1572.57 cw(c-865.29,1560.62) -865.29,1577.52 ; U14.6@-877.24,1572.57 cw(c-865.29,1560.62) -865.29,1577.52 ; U14.6@-877.24,1572.57 cw(c-865.29,1560.62) -865.29,1577.52 ; U14.6@-877.24,1582.47 ccw(c-865.29,1594.42) -865.29,1577.52 ; U14.6@-877.24,1582.47 ccw(c-865.29,1594.42) -865.29,1577.52 ; U14.6@-877.24,1582.47 ccw(c-865.29,1594.42) -865.29,1577.52 ; -844.33,1577.52 cw(c-844.33,1553.38) R26.1@-827.26,1570.45 ; -844.33,1577.52 ccw(c-844.33,1601.66) R26.1@-827.26,1584.59 ; -844.33,1577.52 cw(c-844.33,1553.38) R26.1@-827.26,1570.45 ; -844.33,1577.52 ccw(c-844.33,1601.66) R26.1@-827.26,1584.59 ; -844.33,1577.52 ccw(c-844.33,1601.66) R26.1@-827.26,1584.59 ; -844.33,1577.52 cw(c-844.33,1553.38) R26.1@-827.26,1570.45
NetC56_2: C56.2 R23.1 R28.2 U14.2 | length 972.6
  Top Layer w10: R28.2@-1235.19,1627.52 U14.2@-1130.19,1627.52 -1070.19,1627.52 -1050.19,1647.52 R23.1@-1050.19,1752.52 C56.2@-1050.19,1812.52 ; R28.2@-1228.12,1620.45 cw(c-1211.05,1603.38) -1211.05,1627.52 ; R28.2@-1228.12,1620.45 cw(c-1211.05,1603.38) -1211.05,1627.52 ; R28.2@-1228.12,1620.45 cw(c-1211.05,1603.38) -1211.05,1627.52 ; R28.2@-1228.12,1634.59 ccw(c-1211.05,1651.66) -1211.05,1627.52 ; R28.2@-1228.12,1634.59 ccw(c-1211.05,1651.66) -1211.05,1627.52 ; R28.2@-1228.12,1634.59 ccw(c-1211.05,1651.66) -1211.05,1627.52 ; -1175.09,1627.52 cw(c-1175.09,1610.62) U14.2@-1163.14,1622.57 ; -1175.09,1627.52 ccw(c-1175.09,1644.42) U14.2@-1163.14,1632.47 ; -1175.09,1627.52 cw(c-1175.09,1610.62) U14.2@-1163.14,1622.57 ; -1175.09,1627.52 ccw(c-1175.09,1644.42) U14.2@-1163.14,1632.47 ; -1175.09,1627.52 ccw(c-1175.09,1644.42) U14.2@-1163.14,1632.47 ; -1175.09,1627.52 cw(c-1175.09,1610.62) U14.2@-1163.14,1622.57 ; U14.2@-1097.24,1622.57 cw(c-1085.29,1610.62) -1085.29,1627.52 ; U14.2@-1097.24,1622.57 cw(c-1085.29,1610.62) -1085.29,1627.52 ; U14.2@-1097.24,1622.57 cw(c-1085.29,1610.62) -1085.29,1627.52 ; U14.2@-1097.24,1632.47 ccw(c-1085.29,1644.42) -1085.29,1627.52 ; U14.2@-1097.24,1632.47 ccw(c-1085.29,1644.42) -1085.29,1627.52 ; U14.2@-1097.24,1632.47 ccw(c-1085.29,1644.42) -1085.29,1627.52 ; R23.1@-1057.26,1745.45 cw(c-1074.33,1728.38) -1050.19,1728.38 ; R23.1@-1057.26,1745.45 cw(c-1074.33,1728.38) -1050.19,1728.38 ; R23.1@-1057.26,1745.45 cw(c-1074.33,1728.38) -1050.19,1728.38 ; R23.1@-1057.26,1759.59 ccw(c-1074.33,1776.66) -1050.19,1776.66 ; R23.1@-1057.26,1759.59 ccw(c-1074.33,1776.66) -1050.19,1776.66 ; R23.1@-1057.26,1759.59 ccw(c-1074.33,1776.66) -1050.19,1776.66 ; C56.2@-1057.26,1805.45 cw(c-1074.33,1788.38) -1050.19,1788.38 ; C56.2@-1057.26,1805.45 cw(c-1074.33,1788.38) -1050.19,1788.38 ; C56.2@-1057.26,1805.45 cw(c-1074.33,1788.38) -1050.19,1788.38 ; -1050.19,1728.38 cw(c-1026.05,1728.38) R23.1@-1043.12,1745.45 ; -1050.19,1728.38 cw(c-1026.05,1728.38) R23.1@-1043.12,1745.45 ; -1050.19,1728.38 cw(c-1026.05,1728.38) R23.1@-1043.12,1745.45 ; -1050.19,1776.66 ccw(c-1026.05,1776.66) R23.1@-1043.12,1759.59 ; -1050.19,1776.66 ccw(c-1026.05,1776.66) R23.1@-1043.12,1759.59 ; -1050.19,1776.66 ccw(c-1026.05,1776.66) R23.1@-1043.12,1759.59 ; -1050.19,1788.38 cw(c-1026.05,1788.38) C56.2@-1043.12,1805.45 ; -1050.19,1788.38 cw(c-1026.05,1788.38) C56.2@-1043.12,1805.45 ; -1050.19,1788.38 cw(c-1026.05,1788.38) C56.2@-1043.12,1805.45
NetC57_2: C57.2 R27.1 | length 265.7
  Top Layer w15: C57.2@-580.19,-912.48 R27.1@-580.19,-817.48 ; C57.2@-585.49,-907.18 ccw(c-598.3,-894.37) -580.19,-894.37 ; C57.2@-585.49,-907.18 ccw(c-598.3,-894.37) -580.19,-894.37 ; C57.2@-585.49,-907.18 ccw(c-598.3,-894.37) -580.19,-894.37 ; R27.1@-585.49,-822.78 cw(c-598.3,-835.59) -580.19,-835.59 ; R27.1@-585.49,-822.78 cw(c-598.3,-835.59) -580.19,-835.59 ; R27.1@-585.49,-822.78 cw(c-598.3,-835.59) -580.19,-835.59 ; -580.19,-894.37 ccw(c-562.08,-894.37) C57.2@-574.89,-907.18 ; -580.19,-894.37 ccw(c-562.08,-894.37) C57.2@-574.89,-907.18 ; -580.19,-894.37 ccw(c-562.08,-894.37) C57.2@-574.89,-907.18 ; -580.19,-835.59 cw(c-562.08,-835.59) R27.1@-574.89,-822.78 ; -580.19,-835.59 cw(c-562.08,-835.59) R27.1@-574.89,-822.78 ; -580.19,-835.59 cw(c-562.08,-835.59) R27.1@-574.89,-822.78
NetC58_2: C58.2 R28.1 | length 327.5
  Top Layer w10: C58.2@-1290.19,1527.52 R28.1@-1290.19,1627.52 ; C58.2@-1297.26,1534.59 ccw(c-1314.33,1551.66) -1290.19,1551.66 ; C58.2@-1297.26,1534.59 ccw(c-1314.33,1551.66) -1290.19,1551.66 ; C58.2@-1297.26,1534.59 ccw(c-1314.33,1551.66) -1290.19,1551.66 ; R28.1@-1297.26,1620.45 cw(c-1314.33,1603.38) -1290.19,1603.38 ; R28.1@-1297.26,1620.45 cw(c-1314.33,1603.38) -1290.19,1603.38 ; R28.1@-1297.26,1620.45 cw(c-1314.33,1603.38) -1290.19,1603.38 ; -1290.19,1551.66 ccw(c-1266.05,1551.66) C58.2@-1283.12,1534.59 ; -1290.19,1551.66 ccw(c-1266.05,1551.66) C58.2@-1283.12,1534.59 ; -1290.19,1551.66 ccw(c-1266.05,1551.66) C58.2@-1283.12,1534.59 ; -1290.19,1603.38 cw(c-1266.05,1603.38) R28.1@-1283.12,1620.45 ; -1290.19,1603.38 cw(c-1266.05,1603.38) R28.1@-1283.12,1620.45 ; -1290.19,1603.38 cw(c-1266.05,1603.38) R28.1@-1283.12,1620.45
NetC59_2: C59.2 R25.2 U15.3 | length 1098.2
  Top Layer w10: U15.3@-385.19,-267.28 -339.99,-312.48 -120.19,-312.48 -80.19,-352.48 -80.19,-787.48 C59.2@-55.19,-812.48 R25.2@-115.19,-812.48 ; R25.2@-108.12,-819.55 cw(c-91.05,-836.62) -91.05,-812.48 ; R25.2@-108.12,-819.55 cw(c-91.05,-836.62) -91.05,-812.48 ; R25.2@-108.12,-819.55 cw(c-91.05,-836.62) -91.05,-812.48 ; R25.2@-108.12,-805.41 ccw(c-91.05,-788.34) -91.05,-812.48 ; R25.2@-108.12,-805.41 ccw(c-91.05,-788.34) -91.05,-812.48 ; R25.2@-108.12,-805.41 ccw(c-91.05,-788.34) -91.05,-812.48 ; -79.33,-812.48 cw(c-79.33,-836.62) C59.2@-62.26,-819.55 ; -79.33,-812.48 ccw(c-79.33,-788.34) C59.2@-62.26,-805.41 ; -79.33,-812.48 cw(c-79.33,-836.62) C59.2@-62.26,-819.55 ; -79.33,-812.48 ccw(c-79.33,-788.34) C59.2@-62.26,-805.41 ; -79.33,-812.48 ccw(c-79.33,-788.34) C59.2@-62.26,-805.41 ; -79.33,-812.48 cw(c-79.33,-836.62) C59.2@-62.26,-819.55
NetC60_2: C60.2 R26.2 U16.3 | length 1206.1
  Top Layer w10: U16.3@-1085.19,2182.72 -1039.99,2137.52 -835.19,2137.52 -780.19,2082.52 -780.19,1652.52 C60.2@-760.19,1632.52 R26.2@-820.19,1632.52 ; R26.2@-813.12,1625.45 cw(c-796.05,1608.38) -796.05,1632.52 ; R26.2@-813.12,1625.45 cw(c-796.05,1608.38) -796.05,1632.52 ; R26.2@-813.12,1625.45 cw(c-796.05,1608.38) -796.05,1632.52 ; R26.2@-813.12,1639.59 ccw(c-796.05,1656.66) -796.05,1632.52 ; R26.2@-813.12,1639.59 ccw(c-796.05,1656.66) -796.05,1632.52 ; R26.2@-813.12,1639.59 ccw(c-796.05,1656.66) -796.05,1632.52 ; -784.33,1632.52 cw(c-784.33,1608.38) C60.2@-767.26,1625.45 ; -784.33,1632.52 ccw(c-784.33,1656.66) C60.2@-767.26,1639.59 ; -784.33,1632.52 cw(c-784.33,1608.38) C60.2@-767.26,1625.45 ; -784.33,1632.52 ccw(c-784.33,1656.66) C60.2@-767.26,1639.59 ; -784.33,1632.52 ccw(c-784.33,1656.66) C60.2@-767.26,1639.59 ; -784.33,1632.52 cw(c-784.33,1608.38) C60.2@-767.26,1625.45 ; -777.26,1649.59 cw(c-794.33,1632.52) C60.2@-770.19,1632.52 ; -777.26,1649.59 ccw(c-760.19,1666.66) C60.2@-760.19,1642.52 ; -777.26,1649.59 cw(c-794.33,1632.52) C60.2@-770.19,1632.52 ; -777.26,1649.59 ccw(c-760.19,1666.66) C60.2@-760.19,1642.52 ; -777.26,1649.59 ccw(c-760.19,1666.66) C60.2@-760.19,1642.52 ; -777.26,1649.59 cw(c-794.33,1632.52) C60.2@-770.19,1632.52
NetC64_2: C64.2 C65.2 R35.2 U13.4 | length 1249.1
  Top Layer w10: U13.4@-425.19,-917.48 -360.19,-917.48 v1(-355.19,-912.48) ; U13.4@-392.24,-922.43 cw(c-380.29,-934.38) -380.29,-917.48 ; U13.4@-392.24,-922.43 cw(c-380.29,-934.38) -380.29,-917.48 ; U13.4@-392.24,-922.43 cw(c-380.29,-934.38) -380.29,-917.48 ; U13.4@-392.24,-912.53 ccw(c-380.29,-900.58) -380.29,-917.48 ; U13.4@-392.24,-912.53 ccw(c-380.29,-900.58) -380.29,-917.48 ; U13.4@-392.24,-912.53 ccw(c-380.29,-900.58) -380.29,-917.48 ; -380.54,-917.48 ccw(c-380.54,-887.13) v1@-359.08,-908.59 ; -380.54,-917.48 ccw(c-380.54,-887.13) v1@-359.08,-908.59 ; -380.54,-917.48 ccw(c-380.54,-887.13) v1@-359.08,-908.59
  Bottom Layer w10: R35.2@-455.19,-967.48 -432.19,-967.48 ; -409.83,-917.12 cw(c-394.11,-932.85) C64.2@-385.19,-912.48 ; C64.2@-389.2,-921.64 ccw(c-400.42,-947.25) -420.19,-927.48 ; C65.2@-325.19,-912.48 v1(-355.19,-912.48) C64.2@-385.19,-912.48 ; R35.2@-447.88,-974.3 cw(c-432.19,-988.93) -432.19,-967.48 ; R35.2@-447.88,-974.3 cw(c-432.19,-988.93) -432.19,-967.48 ; R35.2@-447.88,-974.3 cw(c-432.19,-988.93) -432.19,-967.48 ; R35.2@-447.88,-960.66 ccw(c-432.19,-946.03) -432.19,-967.48 ; R35.2@-447.88,-960.66 ccw(c-432.19,-946.03) -432.19,-967.48 ; R35.2@-447.88,-960.66 ccw(c-432.19,-946.03) -432.19,-967.48 ; -432.19,-967.48 -420.19,-955.48 -420.19,-927.48 ; -420.19,-927.48 -405.19,-912.48 ; -405.19,-912.48 cw(c-405.19,-927.48) C64.2@-393.19,-918.48 ; -405.19,-912.48 ccw(c-405.19,-897.48) C64.2@-393.19,-906.48 ; -405.19,-912.48 cw(c-405.19,-927.48) C64.2@-393.19,-918.48 ; -405.19,-912.48 ccw(c-405.19,-897.48) C64.2@-393.19,-906.48 ; -405.19,-912.48 ccw(c-405.19,-897.48) C64.2@-393.19,-906.48 ; -405.19,-912.48 cw(c-405.19,-927.48) C64.2@-393.19,-918.48 ; -405.19,-912.48 C64.2@-385.19,-912.48 ; C64.2@-385.19,-912.48 ccw(c-395.04,-926.06) -406.91,-914.2 cw(c-395.04,-926.06) C64.2@-385.19,-912.48 ; C64.2@-378.12,-919.55 cw(c-361.05,-936.62) v1@-361.05,-912.48 ; C64.2@-378.12,-919.55 cw(c-361.05,-936.62) v1@-361.05,-912.48 ; C64.2@-378.12,-919.55 cw(c-361.05,-936.62) v1@-361.05,-912.48 ; C64.2@-378.12,-905.41 ccw(c-361.05,-888.34) v1@-361.05,-912.48 ; C64.2@-378.12,-905.41 ccw(c-361.05,-888.34) v1@-361.05,-912.48 ; C64.2@-378.12,-905.41 ccw(c-361.05,-888.34) v1@-361.05,-912.48 ; C64.2@-370.58,-915.03 cw(c-366.65,-929.71) v1@-358.24,-917.06 ; C64.2@-370.58,-915.03 cw(c-366.65,-929.71) v1@-358.24,-917.06 ; C64.2@-370.58,-915.03 cw(c-366.65,-929.71) v1@-358.24,-917.06 ; C64.2@-370.58,-909.93 ccw(c-366.65,-895.25) v1@-358.24,-907.9 ; C64.2@-370.58,-909.93 ccw(c-366.65,-895.25) v1@-358.24,-907.9 ; C64.2@-370.58,-909.93 ccw(c-366.65,-895.25) v1@-358.24,-907.9 ; -368.47,-912.48 cw(c-368.47,-925.76) v1@-359.08,-916.37 ; -368.47,-912.48 ccw(c-368.47,-899.2) v1@-359.08,-908.59 ; -368.47,-912.48 cw(c-368.47,-925.76) v1@-359.08,-916.37 ; -368.47,-912.48 ccw(c-368.47,-899.2) v1@-359.08,-908.59 ; -368.47,-912.48 ccw(c-368.47,-899.2) v1@-359.08,-908.59 ; -368.47,-912.48 cw(c-368.47,-925.76) v1@-359.08,-916.37 ; v1@-352.14,-917.06 cw(c-343.73,-929.71) C65.2@-339.8,-915.03 ; v1@-352.14,-917.06 cw(c-343.73,-929.71) C65.2@-339.8,-915.03 ; v1@-352.14,-917.06 cw(c-343.73,-929.71) C65.2@-339.8,-915.03 ; v1@-352.14,-907.9 ccw(c-343.73,-895.25) C65.2@-339.8,-909.93 ; v1@-352.14,-907.9 ccw(c-343.73,-895.25) C65.2@-339.8,-909.93 ; v1@-352.14,-907.9 ccw(c-343.73,-895.25) C65.2@-339.8,-909.93 ; v1@-351.3,-916.37 cw(c-341.91,-925.76) -341.91,-912.48 ; v1@-351.3,-916.37 cw(c-341.91,-925.76) -341.91,-912.48 ; v1@-351.3,-916.37 cw(c-341.91,-925.76) -341.91,-912.48 ; v1@-351.3,-908.59 ccw(c-341.91,-899.2) -341.91,-912.48 ; v1@-351.3,-908.59 ccw(c-341.91,-899.2) -341.91,-912.48 ; v1@-351.3,-908.59 ccw(c-341.91,-899.2) -341.91,-912.48 ; v1@-349.33,-912.48 cw(c-349.33,-936.62) C65.2@-332.26,-919.55 ; v1@-349.33,-912.48 ccw(c-349.33,-888.34) C65.2@-332.26,-905.41 ; v1@-349.33,-912.48 cw(c-349.33,-936.62) C65.2@-332.26,-919.55 ; v1@-349.33,-912.48 ccw(c-349.33,-888.34) C65.2@-332.26,-905.41 ; v1@-349.33,-912.48 ccw(c-349.33,-888.34) C65.2@-332.26,-905.41 ; v1@-349.33,-912.48 cw(c-349.33,-936.62) C65.2@-332.26,-919.55 ; -415.19,-922.48 cw(c-402.01,-935.66) -391.06,-920.57 ccw(c-402.01,-935.66) -415.19,-922.48
NetC66_2: C66.2 C67.2 R36.1 U13.7 | length 917.8
  Top Layer w10: v1(-259.19,-817.48) U13.7@-205.19,-817.48 ; v1@-255.3,-821.37 cw(c-245.91,-830.76) -245.91,-817.48 ; v1@-255.3,-821.37 cw(c-245.91,-830.76) -245.91,-817.48 ; v1@-255.3,-821.37 cw(c-245.91,-830.76) -245.91,-817.48 ; v1@-255.3,-813.59 ccw(c-245.91,-804.2) -245.91,-817.48 ; v1@-255.3,-813.59 ccw(c-245.91,-804.2) -245.91,-817.48 ; v1@-255.3,-813.59 ccw(c-245.91,-804.2) -245.91,-817.48 ; v1@-255.26,-821.33 cw(c-248.16,-828.31) -245.58,-818.69 ; v1@-255.26,-821.33 cw(c-248.16,-828.31) -245.58,-818.69 ; v1@-255.26,-821.33 cw(c-248.16,-828.31) -245.58,-818.69 ; v1@-255.26,-813.63 ccw(c-248.16,-806.66) -245.58,-816.27 ; v1@-255.26,-813.63 ccw(c-248.16,-806.66) -245.58,-816.27 ; v1@-255.26,-813.63 ccw(c-248.16,-806.66) -245.58,-816.27 ; v1@-250.09,-817.48 cw(c-250.09,-834.38) U13.7@-238.14,-822.43 ; v1@-250.09,-817.48 ccw(c-250.09,-800.58) U13.7@-238.14,-812.53 ; v1@-250.09,-817.48 cw(c-250.09,-834.38) U13.7@-238.14,-822.43 ; v1@-250.09,-817.48 ccw(c-250.09,-800.58) U13.7@-238.14,-812.53 ; v1@-250.09,-817.48 ccw(c-250.09,-800.58) U13.7@-238.14,-812.53 ; v1@-250.09,-817.48 cw(c-250.09,-834.38) U13.7@-238.14,-822.43
  Bottom Layer w10: C67.2@-300.19,-817.48 C66.2@-240.19,-817.48 R36.1@-180.19,-817.48 ; v1@-255.3,-821.37 cw(c-245.91,-830.76) -245.91,-817.48 cw(c-245.91,-804.2) v1@-255.3,-813.59 ; C67.2@-293.12,-824.55 cw(c-276.05,-841.62) -276.05,-817.48 ; C67.2@-293.12,-824.55 cw(c-276.05,-841.62) -276.05,-817.48 ; C67.2@-293.12,-824.55 cw(c-276.05,-841.62) -276.05,-817.48 ; C67.2@-293.12,-810.41 ccw(c-276.05,-793.34) -276.05,-817.48 ; C67.2@-293.12,-810.41 ccw(c-276.05,-793.34) -276.05,-817.48 ; C67.2@-293.12,-810.41 ccw(c-276.05,-793.34) -276.05,-817.48 ; -272.47,-817.48 cw(c-272.47,-830.76) v1@-263.08,-821.37 ; -272.47,-817.48 ccw(c-272.47,-804.2) v1@-263.08,-813.59 ; -272.47,-817.48 cw(c-272.47,-830.76) v1@-263.08,-821.37 ; -272.47,-817.48 ccw(c-272.47,-804.2) v1@-263.08,-813.59 ; -272.47,-817.48 ccw(c-272.47,-804.2) v1@-263.08,-813.59 ; -272.47,-817.48 cw(c-272.47,-830.76) v1@-263.08,-821.37 ; v1@-264.33,-817.48 cw(c-264.33,-841.62) C66.2@-247.26,-824.55 ; v1@-264.33,-817.48 ccw(c-264.33,-793.34) C66.2@-247.26,-810.41 ; v1@-264.33,-817.48 cw(c-264.33,-841.62) C66.2@-247.26,-824.55 ; v1@-264.33,-817.48 ccw(c-264.33,-793.34) C66.2@-247.26,-810.41 ; v1@-264.33,-817.48 ccw(c-264.33,-793.34) C66.2@-247.26,-810.41 ; v1@-264.33,-817.48 cw(c-264.33,-841.62) C66.2@-247.26,-824.55 ; C66.2@-233.12,-824.55 cw(c-216.05,-841.62) -216.05,-817.48 ; C66.2@-233.12,-824.55 cw(c-216.05,-841.62) -216.05,-817.48 ; C66.2@-233.12,-824.55 cw(c-216.05,-841.62) -216.05,-817.48 ; C66.2@-233.12,-810.41 ccw(c-216.05,-793.34) -216.05,-817.48 ; C66.2@-233.12,-810.41 ccw(c-216.05,-793.34) -216.05,-817.48 ; C66.2@-233.12,-810.41 ccw(c-216.05,-793.34) -216.05,-817.48 ; -204.33,-817.48 cw(c-204.33,-841.62) R36.1@-187.26,-824.55 ; -204.33,-817.48 ccw(c-204.33,-793.34) R36.1@-187.26,-810.41 ; -204.33,-817.48 cw(c-204.33,-841.62) R36.1@-187.26,-824.55 ; -204.33,-817.48 ccw(c-204.33,-793.34) R36.1@-187.26,-810.41 ; -204.33,-817.48 ccw(c-204.33,-793.34) R36.1@-187.26,-810.41 ; -204.33,-817.48 cw(c-204.33,-841.62) R36.1@-187.26,-824.55
NetC72_2: C72.2 C73.2 R37.2 U14.4 | length 1140.9
  Top Layer w10: U14.4@-1130.19,1527.52 v1(-1075.19,1527.52) ; U14.4@-1097.24,1522.57 cw(c-1085.29,1510.62) v1@-1085.29,1527.52 ; U14.4@-1097.24,1522.57 cw(c-1085.29,1510.62) v1@-1085.29,1527.52 ; U14.4@-1097.24,1522.57 cw(c-1085.29,1510.62) v1@-1085.29,1527.52 ; U14.4@-1097.24,1532.47 ccw(c-1085.29,1544.42) v1@-1085.29,1527.52 ; U14.4@-1097.24,1532.47 ccw(c-1085.29,1544.42) v1@-1085.29,1527.52 ; U14.4@-1097.24,1532.47 ccw(c-1085.29,1544.42) v1@-1085.29,1527.52 ; -1088.47,1527.52 cw(c-1088.47,1514.24) v1@-1079.08,1523.63 ; -1088.47,1527.52 ccw(c-1088.47,1540.8) v1@-1079.08,1531.41 ; -1088.47,1527.52 cw(c-1088.47,1514.24) v1@-1079.08,1523.63 ; -1088.47,1527.52 ccw(c-1088.47,1540.8) v1@-1079.08,1531.41 ; -1088.47,1527.52 ccw(c-1088.47,1540.8) v1@-1079.08,1531.41 ; -1088.47,1527.52 cw(c-1088.47,1514.24) v1@-1079.08,1523.63
  Bottom Layer w10: R37.2@-1166.18,1481.68 ccw(c-1154.96,1507.29) -1135.19,1487.52 ; -1145.55,1477.16 cw(c-1161.27,1492.89) R37.2@-1170.19,1472.52 -1150.19,1472.52 ; -1125.95,1524.76 cw(c-1113.77,1512.58) C72.2@-1105.19,1527.52 ; C72.2@-1113.68,1522.24 ccw(c-1123.19,1516.32) -1123.19,1527.52 ; C72.2@-1113.68,1532.8 cw(c-1123.19,1538.72) -1123.19,1527.52 ; C72.2@-1110.17,1518.85 ccw(c-1120.51,1500.84) -1135.19,1515.52 ; C73.2@-1045.19,1527.52 v1(-1075.19,1527.52) C72.2@-1105.19,1527.52 ; R37.2@-1162.19,1466.52 cw(c-1150.19,1457.52) -1150.19,1472.52 ; R37.2@-1162.19,1466.52 cw(c-1150.19,1457.52) -1150.19,1472.52 ; R37.2@-1162.19,1466.52 cw(c-1150.19,1457.52) -1150.19,1472.52 ; R37.2@-1162.19,1478.52 ccw(c-1150.19,1487.52) -1150.19,1472.52 ; R37.2@-1162.19,1478.52 ccw(c-1150.19,1487.52) -1150.19,1472.52 ; R37.2@-1162.19,1478.52 ccw(c-1150.19,1487.52) -1150.19,1472.52 ; -1150.19,1472.52 -1135.19,1487.52 ; -1135.19,1487.52 -1135.19,1515.52 ; -1135.19,1515.52 -1123.19,1527.52 ; -1123.19,1527.52 C72.2@-1105.19,1527.52 ; C72.2@-1105.19,1527.52 ccw(c-1110.81,1499.54) -1130.99,1519.72 cw(c-1110.81,1499.54) C72.2@-1105.19,1527.52 ; C72.2@-1098.12,1520.45 cw(c-1081.05,1503.38) v1@-1081.05,1527.52 ; C72.2@-1098.12,1520.45 cw(c-1081.05,1503.38) v1@-1081.05,1527.52 ; C72.2@-1098.12,1520.45 cw(c-1081.05,1503.38) v1@-1081.05,1527.52 ; C72.2@-1098.12,1534.59 ccw(c-1081.05,1551.66) v1@-1081.05,1527.52 ; C72.2@-1098.12,1534.59 ccw(c-1081.05,1551.66) v1@-1081.05,1527.52 ; C72.2@-1098.12,1534.59 ccw(c-1081.05,1551.66) v1@-1081.05,1527.52 ; C72.2@-1090.58,1524.97 cw(c-1086.65,1510.29) v1@-1078.24,1522.94 ; C72.2@-1090.58,1524.97 cw(c-1086.65,1510.29) v1@-1078.24,1522.94 ; C72.2@-1090.58,1524.97 cw(c-1086.65,1510.29) v1@-1078.24,1522.94 ; C72.2@-1090.58,1530.07 ccw(c-1086.65,1544.75) v1@-1078.24,1532.1 ; C72.2@-1090.58,1530.07 ccw(c-1086.65,1544.75) v1@-1078.24,1532.1 ; C72.2@-1090.58,1530.07 ccw(c-1086.65,1544.75) v1@-1078.24,1532.1 ; -1088.47,1527.52 cw(c-1088.47,1514.24) v1@-1079.08,1523.63 ; -1088.47,1527.52 ccw(c-1088.47,1540.8) v1@-1079.08,1531.41 ; -1088.47,1527.52 cw(c-1088.47,1514.24) v1@-1079.08,1523.63 ; -1088.47,1527.52 ccw(c-1088.47,1540.8) v1@-1079.08,1531.41 ; -1088.47,1527.52 ccw(c-1088.47,1540.8) v1@-1079.08,1531.41 ; -1088.47,1527.52 cw(c-1088.47,1514.24) v1@-1079.08,1523.63 ; v1@-1072.14,1522.94 cw(c-1063.73,1510.29) C73.2@-1059.8,1524.97 ; v1@-1072.14,1522.94 cw(c-1063.73,1510.29) C73.2@-1059.8,1524.97 ; v1@-1072.14,1522.94 cw(c-1063.73,1510.29) C73.2@-1059.8,1524.97 ; v1@-1072.14,1532.1 ccw(c-1063.73,1544.75) C73.2@-1059.8,1530.07 ; v1@-1072.14,1532.1 ccw(c-1063.73,1544.75) C73.2@-1059.8,1530.07 ; v1@-1072.14,1532.1 ccw(c-1063.73,1544.75) C73.2@-1059.8,1530.07 ; v1@-1071.3,1523.63 cw(c-1061.91,1514.24) -1061.91,1527.52 ; v1@-1071.3,1523.63 cw(c-1061.91,1514.24) -1061.91,1527.52 ; v1@-1071.3,1523.63 cw(c-1061.91,1514.24) -1061.91,1527.52 ; v1@-1071.3,1531.41 ccw(c-1061.91,1540.8) -1061.91,1527.52 ; v1@-1071.3,1531.41 ccw(c-1061.91,1540.8) -1061.91,1527.52 ; v1@-1071.3,1531.41 ccw(c-1061.91,1540.8) -1061.91,1527.52 ; v1@-1069.33,1527.52 cw(c-1069.33,1503.38) C73.2@-1052.26,1520.45 ; v1@-1069.33,1527.52 ccw(c-1069.33,1551.66) C73.2@-1052.26,1534.59 ; v1@-1069.33,1527.52 cw(c-1069.33,1503.38) C73.2@-1052.26,1520.45 ; v1@-1069.33,1527.52 ccw(c-1069.33,1551.66) C73.2@-1052.26,1534.59 ; v1@-1069.33,1527.52 ccw(c-1069.33,1551.66) C73.2@-1052.26,1534.59 ; v1@-1069.33,1527.52 cw(c-1069.33,1503.38) C73.2@-1052.26,1520.45